# Altium PCB master_rev1.PcbDoc
Units mil, origin at the board's own origin, x right, y up, seen from the top; angles counter-clockwise.
Board outline 6000 x 4000 mil, 4 copper layers (Top Layer, GND, PWR, Bottom Layer), stack 23.756 mil thick; 77 components, 68 nets, 324 pads, 89 vias.
Unrouted connection lines stored in the file: 41.
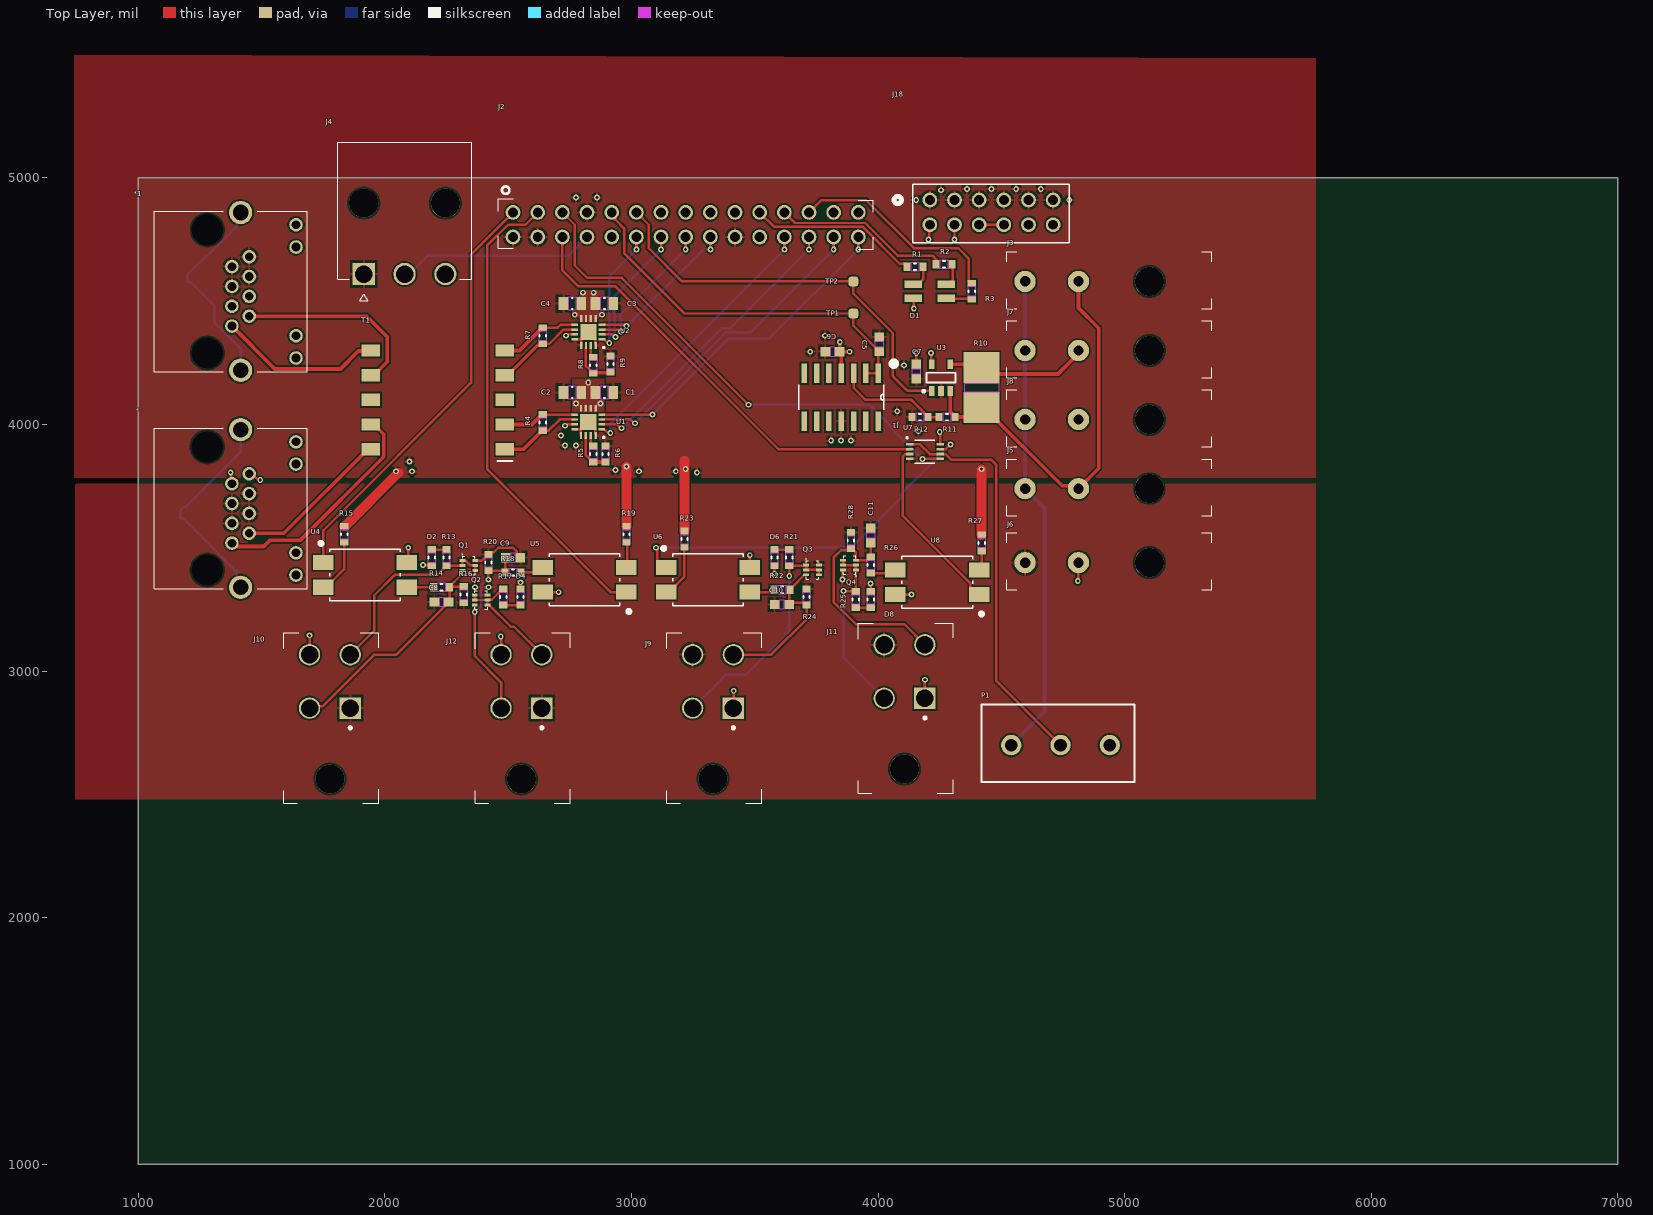
[diagram p0: Top Layer view]
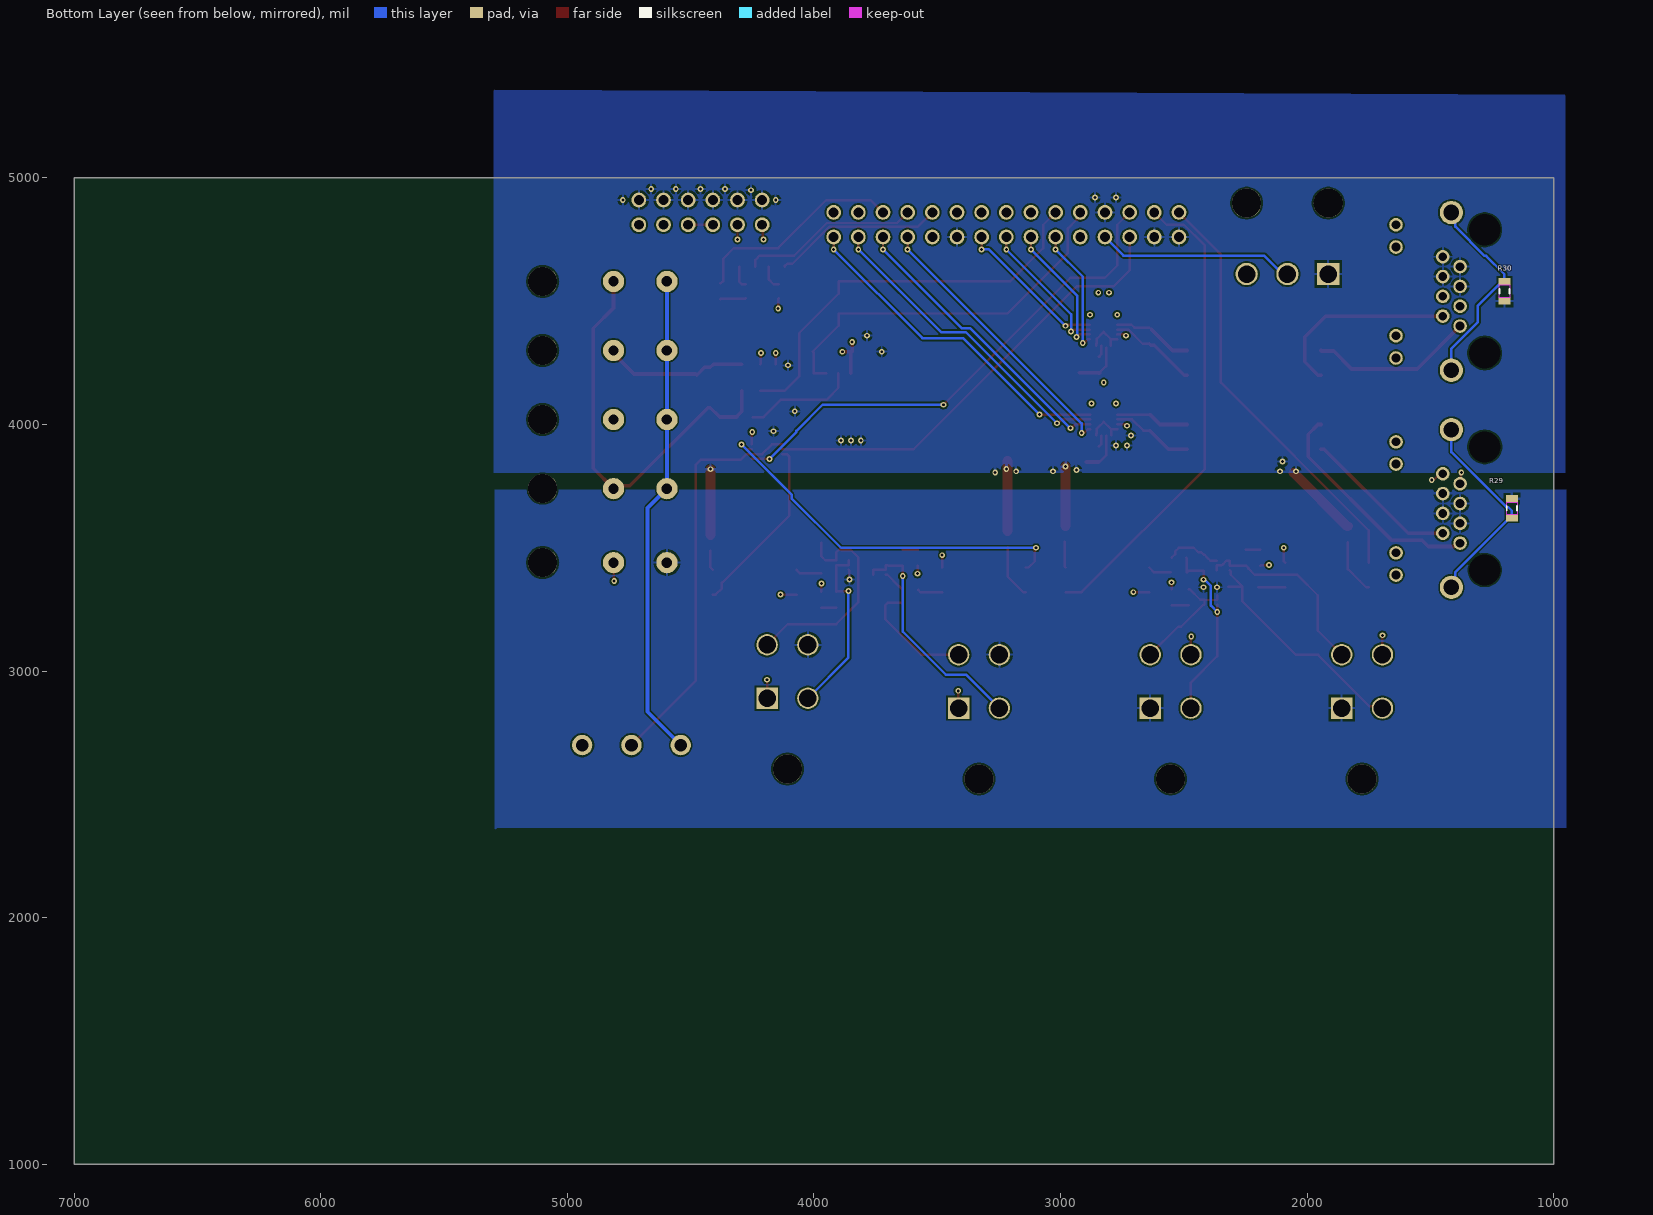
[diagram p1: Bottom Layer view, seen from below]
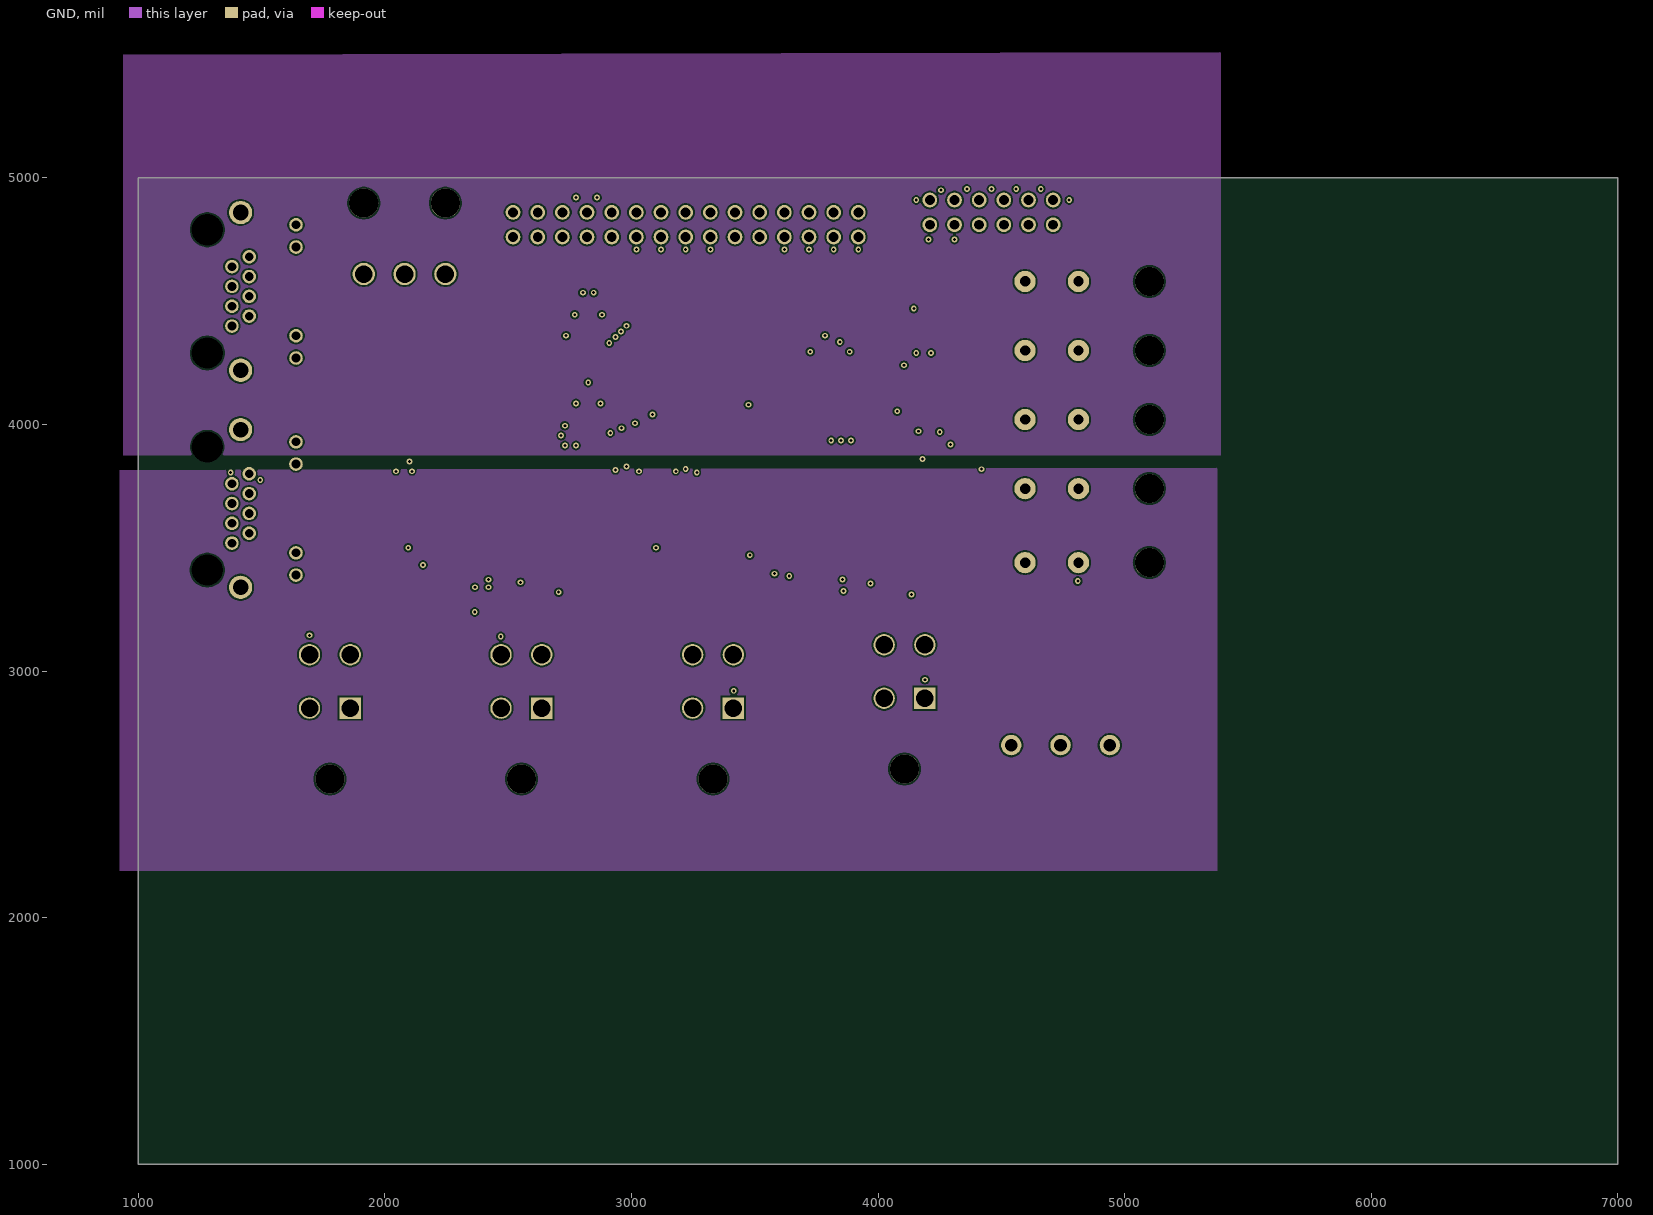
[diagram p2: GND]
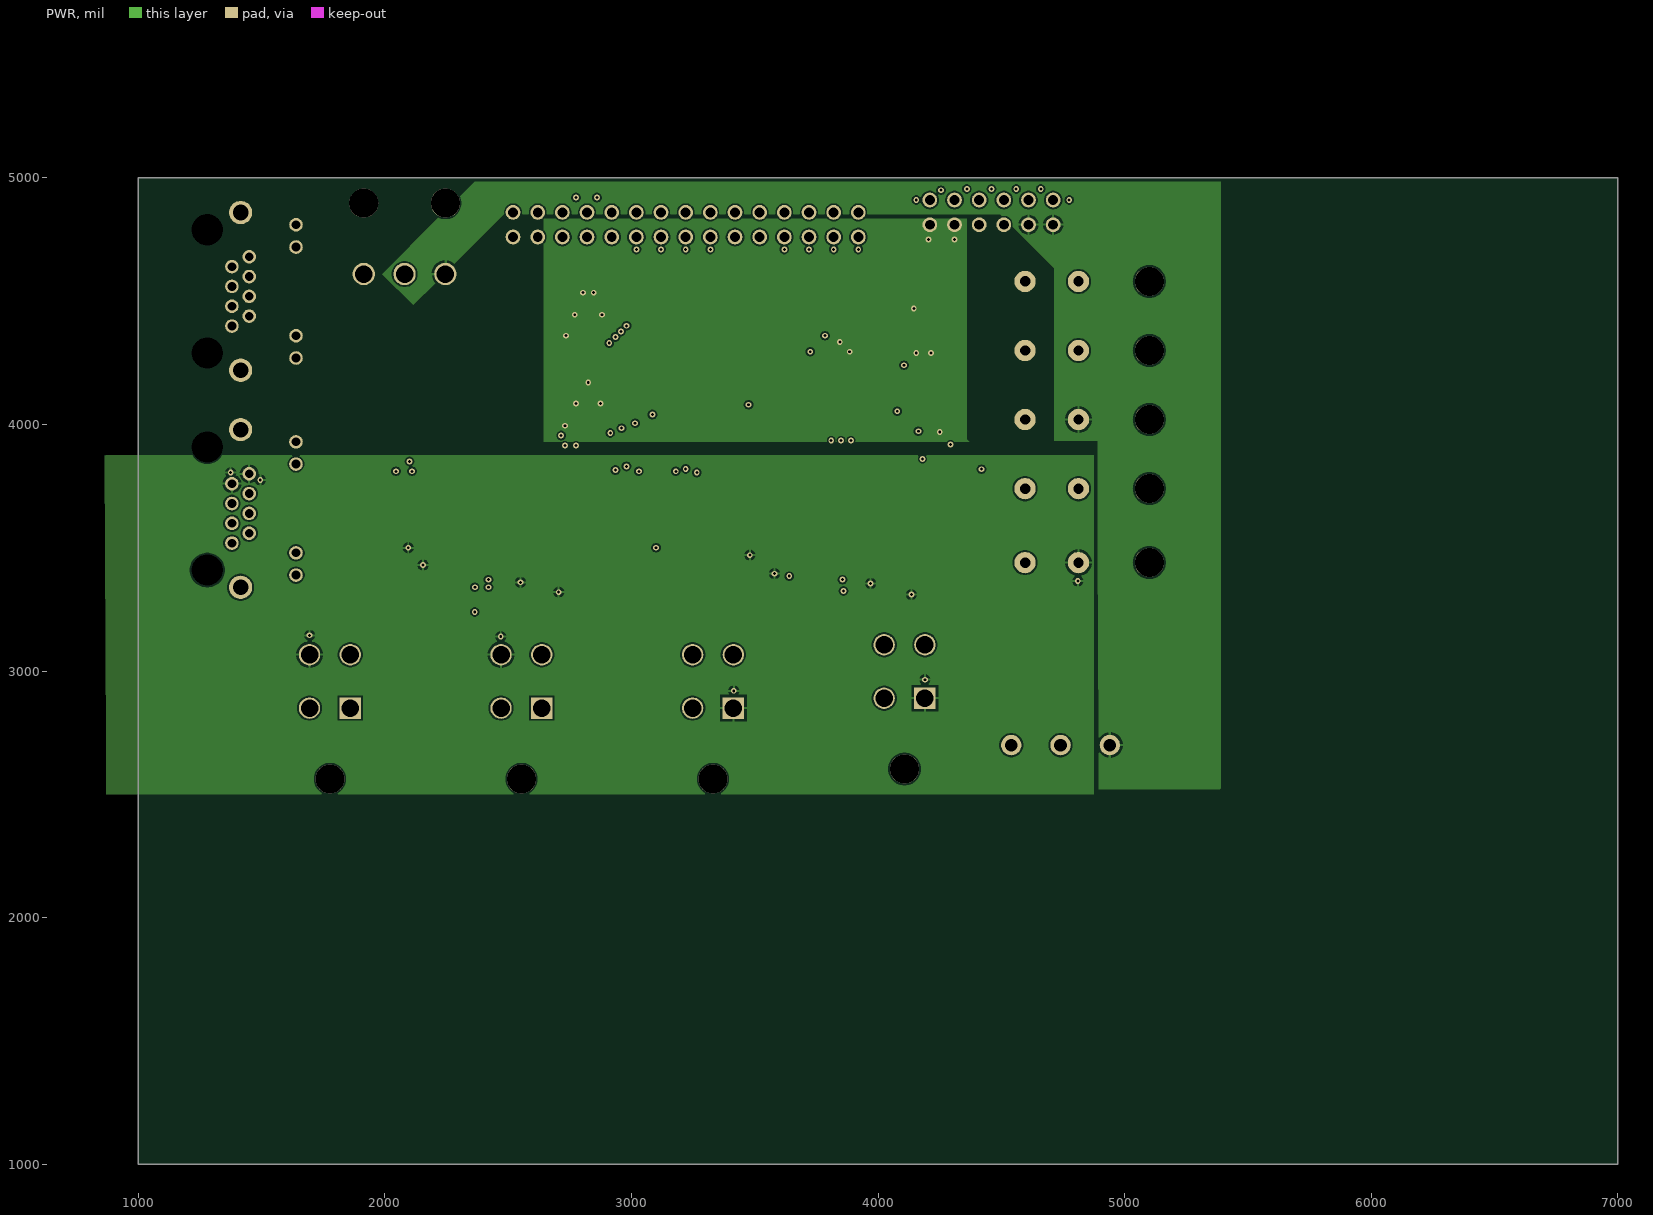
[diagram p3: PWR]
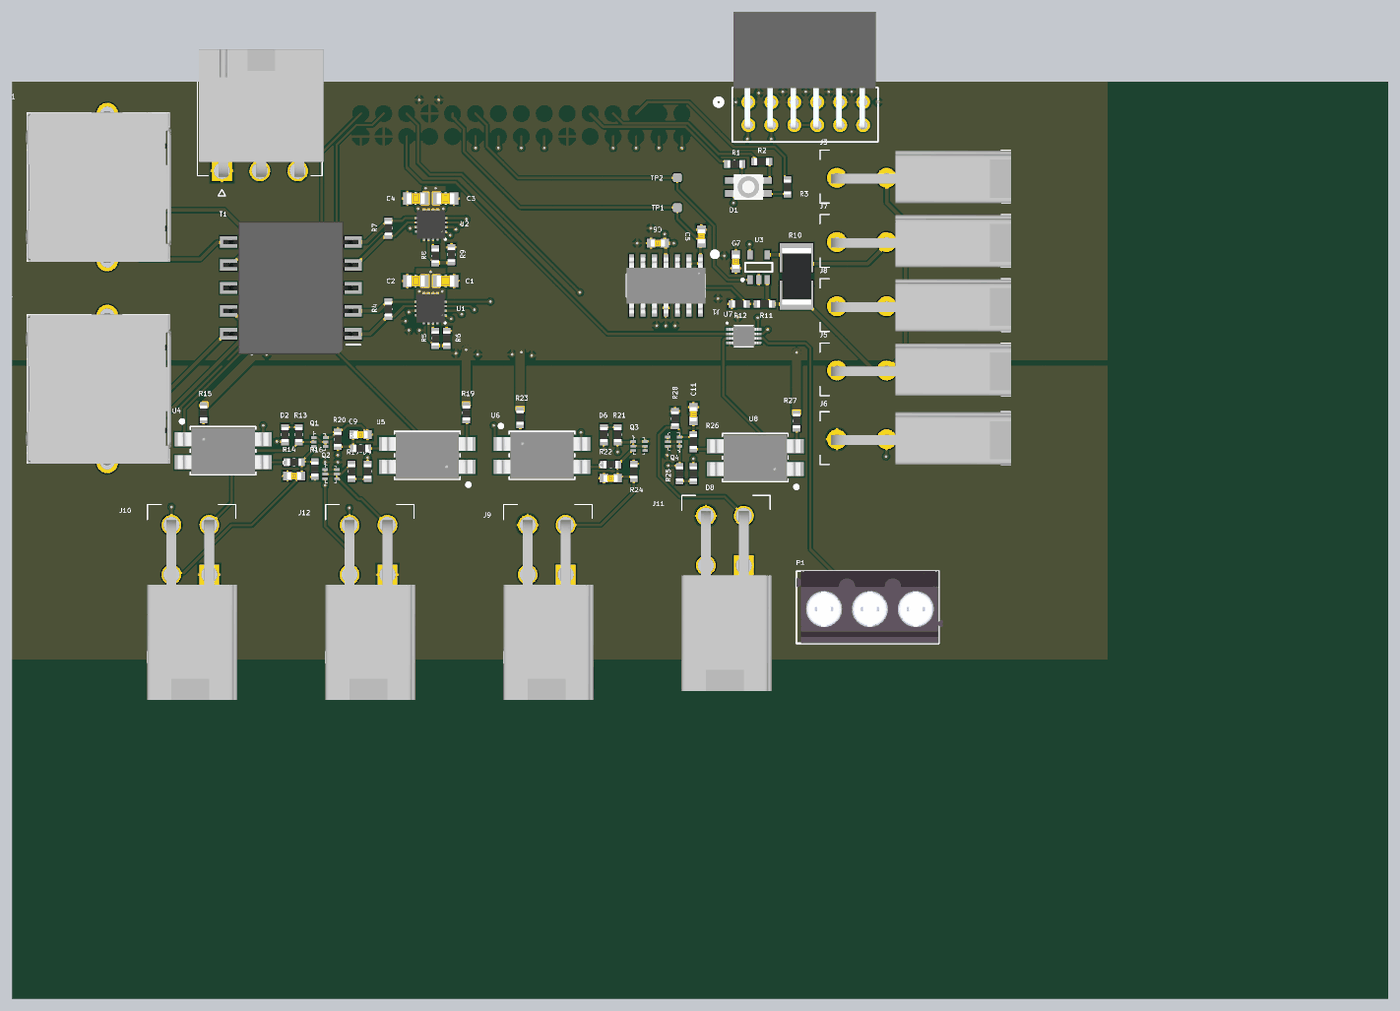
[diagram p4: 3D render of the assembled board from above, using the file's embedded part models]

## Layer stack, top to bottom
Top Solder: solder mask 0.4, Solder Resist, Dk 3.5
Top Layer: signal copper 1.4
Dielectric 2: prepreg 2.8, PP-006, Dk 4.1
GND: signal copper 1.378
Dielectric 1: dielectric 12.6, FR-4, Dk 4.8
PWR: signal copper 1.378
Dielectric 5: prepreg 2.8, PP-006, Dk 4.1
Bottom Layer: signal copper 1.4
Bottom Solder: solder mask 0.4, Solder Resist, Dk 3.5

## Board outline
1000,1000 7000,1000 7000,5000 1000,5000

## Design rules (kind name [scope] priority, off if disabled: settings)
Clearance [All] p1: gap=7 ignorepadtopadclearanceinfootprint=FALSE except(5: Arc-Arc Arc-Track Track-Track)
DiffPairsRouting [All] p1: maxlimit=10 minlimit=10 mostfreqgap=10 toplayer_minwidth=15 toplayer_maxwidth=15 toplayer_prefwidth=15 midlayer1_minwidth=15 midlayer1_maxwidth=15 midlayer1_prefwidth=15 midlayer2_minwidth=15 midlayer2_maxwidth=15 midlayer2_prefwidth=15 bottomlayer_minwidth=15 bottomlayer_maxwidth=15 bottomlayer_prefwidth=15 maxuncoupledlength=500
HoleSize [All] p1: absolutevalues=TRUE maxlimit=1000 minlimit=1 maxpercent=80.000 minpercent=20.000
PolygonConnect PolygonConnect_2 [InNet('3.3V')] p1: connectstyle=Direct reliefconductorwidth=10 reliefentries=4 polygonreliefangle="90 Angle" airgapwidth=10
PolygonConnect [All] p2: connectstyle=Relief reliefconductorwidth=10 reliefentries=4 polygonreliefangle="90 Angle" airgapwidth=10
RoomDefinition U_Precharge [InComponentClass('U_Precharge')] p1: confinementstyle=ConfineIn formatcopy=TRUE lockcomponents=FALSE outline 0,0 2000,0 2000,1000 0,1000
RoomDefinition U_MCU_Platform [InComponentClass('U_MCU_Platform')] p2: confinementstyle=ConfineIn formatcopy=TRUE lockcomponents=FALSE outline 0,0 2000,0 2000,1000 0,1000
RoomDefinition U_LV_Sensing [InComponentClass('U_LV_Sensing')] p3: confinementstyle=ConfineIn formatcopy=TRUE lockcomponents=FALSE outline 0,0 2000,0 2000,1000 0,1000
RoomDefinition U_ISO_SPI [InComponentClass('U_ISO_SPI')] p4: confinementstyle=ConfineIn formatcopy=TRUE lockcomponents=FALSE outline 0,0 2000,0 2000,1000 0,1000
RoomDefinition U_Contactor [InComponentClass('U_Contactor')] p5: confinementstyle=ConfineIn formatcopy=TRUE lockcomponents=FALSE outline 0,0 2000,0 2000,1000 0,1000
RoomDefinition Connectors [InComponentClass('Connectors')] p6: confinementstyle=ConfineIn formatcopy=TRUE lockcomponents=FALSE outline 0,0 2000,0 2000,1000 0,1000
RoutingVias [All] p1: holewidth=28 width=50 viastyle="Through Hole" minholewidth=28 minwidth=50 maxholewidth=28 maxwidth=50
SolderMaskExpansion [All] p1: expansion=4 istentingtop=FALSE
Width [All] p1: maxlimit=40 minlimit=10 preferedwidth=10
28 further rules are at their usual default settings.

## Classes and differential pairs
component class U_Precharge: C8 C9 D2 D4 Q1 Q2 R13 R14 R15 R16 R17 R18 R19 R20 U4 U5
component class U_MCU_Platform: D1 J2 J4 J18 R1 R2 R3
component class U_LV_Sensing: C5 C6 C7 J1 R10 R11 R12 TP1 TP2 U3
component class U_ISO_SPI: C1 C2 C3 C4 R4 R5 R6 R7 R8 R9 T1 U1 U2
component class U_Contactor: C10 C11 D6 D8 Q3 Q4 R21 R22 R23 R24 R25 R26 R27 R28 U6 U7 U8
component class Connectors: * *1 J3 J5 J6 J7 J8 J9 J10 J11 J12 P1 R29 R30
differential pair RX2: +RX2_P -RX2_N
differential pair RX1: +RX1_P -RX1_N
differential pair LV: +LV_P -LV_N
differential pair IPB: +IPB_P -IPB_N
differential pair IPA: +IPA_P -IPA_N

## Components (designator, comment, footprint, x,y, rotation, side; value= is the part's Value field where it differs from the comment)
* "MTJ-88ARX1-FSM-LV" MTJ-88ARX1-FSM-LV 1369.92,3648.9 r270 top
*1 "MTJ-88ARX1-FSM-LV" MTJ-88ARX1-FSM-LV 1370,4529.06 r270 top
C1 "10V" "0805 - Capacitor" 2890,4130 r180 top value=100nF
C2 "10V" "0805 - Capacitor" 2760,4130 r180 top value=100nF
C3 "10V" "0805 - Capacitor" 2890,4490 r180 top value=100nF
C4 "10V" "0805 - Capacitor" 2760,4490 r180 top value=100nF
C5 "Capacitor - Nonpolarized" "0603 - Capacitor" 4005,4325 r270 top value=10nF
C6 "Capacitor - Nonpolarized" "0603 - Capacitor" 3815,4295 r0 top value=100nF
C7 "Capacitor - Nonpolarized" "0603 - Capacitor" 4155,4215 r90 top value=10uF
C8 "Capacitor - Nonpolarized" "0603 - Capacitor" 2230,3280 r0 top value=10pF
C9 "Capacitor - Nonpolarized" "0603 - Capacitor" 2520,3460 r180 top value=10pF
C10 "Capacitor - Nonpolarized" "0603 - Capacitor" 3610,3270 r0 top value=10pF
C11 "Capacitor - Nonpolarized" "0603 - Capacitor" 3970,3550 r270 top value=10pF
D1 "AAA3528LSEEZGKQBKS" "4-PLCC RGB LED" 4210,4540 r180 top
D2 "150060AS75000" "0603 - Resistor" 2190,3460 r90 top
D4 "150060AS75000" "0603 - Resistor" 2550,3300 r270 top
D6 "150060AS75000" "0603 - Resistor" 3580,3460 r90 top
D8 "150060AS75000" "0603 - Resistor" 3970,3290 r270 top
J1 "LM324DR" LM324DR 3845,4105 r270 top
J2 "G431 GPIO" "G431 Header (GPIO Connector)" 3975,5245 r180 top
J3 "MOLEX0039301021" MOLEX0039301021 4812.6,4580 r90 top
J4 "WM23935-ND" MOLEX_39303037 1914.65,4610 r180 top
J5 "MOLEX0039301021" MOLEX0039301021 4812.6,3740 r90 top
J6 "MOLEX0039301021" MOLEX0039301021 4812.6,3440 r90 top
J7 "MOLEX0039301021" MOLEX0039301021 4812.6,4300 r90 top
J8 "MOLEX0039301021" MOLEX0039301021 4812.6,4020 r90 top
J9 "MOLEX0039301042" MOLEX0039301042 3413.33,2850 r0 top
J10 "MOLEX0039301042" MOLEX0039301042 1860,2850 r0 top
J11 "MOLEX0039301042" MOLEX0039301042 4190,2890 r0 top
J12 "MOLEX0039301042" MOLEX0039301042 2636.67,2850 r0 top
J18 "G431 POWER" "G431 HEADER (POWER CONNECTOR)" 4710,4810 r180 top
P1 "1760520000" 1760520000 4540,2700 r0 top
Q1 "Si1078X MOSFET-N" "Si1078X NMOS 30V" 2340,3420 r180 top
Q2 "Si1078X MOSFET-N" "Si1078X NMOS 30V" 2390,3280 r180 top
Q3 "Si1078X MOSFET-N" "Si1078X NMOS 30V" 3733.62,3402.05 r180 top
Q4 "Si1078X MOSFET-N" "Si1078X NMOS 30V" 3884.41,3437.95 r0 top
R1 "1%" "0603 - Resistor" 4150,4640 r0 top value=325R
R2 "1%" "0603 - Resistor" 4267.52,4650 r0 top value=325R
R3 "1%" "0603 - Resistor" 4380,4540 r270 top value=750R
R4 "1%" "0603 - Resistor" 2640,4007.52 r270 top value=120R
R5 "1%" "0603 - Resistor" 2845,3880 r270 top value=3k
R6 "1%" "0603 - Resistor" 2895,3880 r270 top value=1k
R7 "1%" "0603 - Resistor" 2640,4360 r90 top value=120R
R8 "1%" "0603 - Resistor" 2845,4240 r270 top value=3k
R9 "1%" "0603 - Resistor" 2915,4245 r270 top value=1k
R10 "Resistor" "2512 - RESISTOR" 4420,4150 r90 top value=220m
R11 "Resistor" "0603 - Resistor" 4280,4030 r180 top value=220k
R12 "Resistor" "0603 - Resistor" 4170,4030 r0 top value=33k
R13 "Resistor" "0603 - Resistor" 2250,3460 r90 top value=1k
R14 "Resistor" "0603 - Resistor" 2230,3340 r0 top value=320
R15 "Resistor" "0603 - Resistor" 1835,3555 r270 top value=220
R16 "Resistor" "0603 - Resistor" 2320,3310 r90 top value=1k
R17 "Resistor" "0603 - Resistor" 2480,3300 r270 top value=1k
R18 "Resistor" "0603 - Resistor" 2520,3400 r180 top value=320
R19 "Resistor" "0603 - Resistor" 2980,3555 r270 top value=220
R20 "Resistor" "0603 - Resistor" 2420,3440 r270 top value=1k
R21 "Resistor" "0603 - Resistor" 3640,3460 r90 top value=1k
R22 "Resistor" "0603 - Resistor" 3610,3330 r0 top value=320
R23 "Resistor" "0603 - Resistor" 3215,3535 r270 top value=220
R24 "Resistor" "0603 - Resistor" 3710,3300 r270 top value=1k
R25 "Resistor" "0603 - Resistor" 3910,3290 r270 top value=1k
R26 "Resistor" "0603 - Resistor" 3970,3430 r90 top value=320
R27 "Resistor" "0603 - Resistor" 4420,3520 r270 top value=220
R28 "Resistor" "0603 - Resistor" 3890,3530 r270 top value=1k
R29 "Resistor" "0805 - Resistor" 1170,3660 r270 bottom value=DNP
R30 "Resistor" "0805 - Resistor" 1200,4540 r90 bottom value=DNP
T1 "HM2100NLT" HM2100NLT 2215,4100 r90 top
TP1 "Test Point" "Test Point" 3900,4450 r90 top
TP2 "Test Point" "Test Point" 3900,4580 r90 top locked
U1 "LTC6820" LT6820_QFN 2824.88,4010.47 r180 top
U2 "LTC6820" LT6820_QFN 2825.47,4375.12 r180 top
U3 "INA180" INA180 4255,4190 r90 top
U4 "PC817XNNIP0F" PC817XNNIP0F_SHP 1920,3390 r0 top
U5 "PC817XNNIP0F" PC817XNNIP0F_SHP 2810,3370 r180 top
U6 "PC817XNNIP0F" PC817XNNIP0F_SHP 3310,3370 r0 top
U7 "74LVC2G32DC,125" VSSOP8_SOT765-1_NEX 4190,3890 r0 top
U8 "PC817XNNIP0F" PC817XNNIP0F_SHP 4240,3360 r180 top

## Footprints (in the part's own frame and the unit in brackets; to place one, negate y for a bottom-side part, rotate by r counter-clockwise, add the part's x,y. Pads: shape width x height; smd on the part's side, far side on the other; paste and mask are expansions set on the pad)
"4-PLCC RGB LED" [mm]
  rect 1.8x0.75 smd: 1(1.7,-0.725) 2(-1.7,-0.725) 3(-1.7,0.725) 4(1.7,0.725)
  body extent -1.75,-1.4 1.75,1.4, height 1.9
"0603 - Capacitor" [mm] "0603 Chip Capacitor - IPC Medium Density"
  rect 0.95x0.95 smd: 1(-0.75,0) 2(0.75,0)
  Top Layer keep-out region: -0.25,0.45 -0.25,-0.45 0.25,-0.45 0.25,0.45
  body extent -0.8,-0.4 0.8,0.4, height 0.8
"0603 - Resistor" [mm] "0603 Chip Resistor - IPC Medium Density"
  rect 0.7x0.85 smd: 1(-0.825,0) 2(0.825,0)
  Top Layer keep-out region: -0.45,0.4 -0.45,-0.4 0.45,-0.4 0.45,0.4
  silkscreen extent -0.1,-0.33 0.1,0.33, body extent -0.8,-0.4 0.8,0.4, height 0.45
"0805 - Capacitor" [mm] "0805 Chip Capacitor - IPC Medium Density"
  rect 1x1.35 smd: 1(-0.925,0) 2(0.925,0)
  Top Layer keep-out region: -0.4,0.65 -0.4,-0.65 0.4,-0.65 0.4,0.65
  silkscreen extent -0.05,-0.58 0.05,0.58, body extent -1,-0.6 1,0.6, height 1.2
"0805 - Resistor" [mm] "0805 Chip Resistor - IPC Medium Density"
  rect 0.75x1.25 smd: 1(-1,0) 2(1,0)
  Top Layer keep-out region: -0.6,0.6 -0.6,-0.6 0.6,-0.6 0.6,0.6
  silkscreen extent -0.25,-0.53 0.25,0.53, body extent -1,-0.6 1,0.6, height 0.5
"2512 - RESISTOR" [mm]
  rect 3.2x3.7 smd: 1(-2.075,0) 2(2.075,0)
  Top Layer keep-out region: -0.45,1.8 -0.45,-1.8 0.4,-1.8 0.4,1.8
  body extent -3.15,-1.6 3.15,1.6, height 0.6
1760520000 [mm] "5.08mm pitch screw connector"
  round 2.1 hole 1.3: 1(0,0) 2(5.08,0) 3(10.16,0)
  silkscreen extent -3.05,-3.81 12.7,4.19, body extent -3.05,-3.81 13.14,4.19, height 10
"G431 Header (GPIO Connector)" [mil] "30 Position Header Connector 0.100\" (2.54mm) Through Hole, Right Angle Gold"
  round 60 hole 40.16: 1(1455,385) 2(1355,385) 3(1255,385) 4(1155,385) 5(1055,385) 6(955,385) 7(855,385) 8(755,385) 9(655,385) 10(555,385) 11(455,385) 12(355,385) 13(255,385) 14(155,385) 15(55,385) 16(1455,485) 17(1355,485) 18(1255,485) 19(1155,485) 20(1055,485) 21(955,485) 22(855,485) 23(755,485) 24(655,485) 25(555,485) 26(455,485) 27(355,485) 28(255,485) 29(155,485) 30(55,485)
  silkscreen extent -5,280 1515,535, body extent -5,-10 1515,499, height 208
"G431 HEADER (POWER CONNECTOR)" [mil] "12 Position Header Connector 0.100\" (2.54mm) Through Hole, Right Angle Gold"
  round 60 hole 40 mask+0: 1(500,-100) 2(400,-100) 3(300,-100) 4(200,-100) 5(100,-100) 6(0,-100) 7(500,0) 8(400,0) 9(300,0) 10(200,0) 11(100,0) 12(0,0)
  silkscreen extent -65,-164 645,74, body extent -55,-495 565,15, height 200
HM2100NLT [mm]
  rect 1.27x1.89 smd: 1(-5.08,-6.895) 2(-2.54,-6.895) 3(0,-6.895) 4(2.54,-6.895) 5(5.08,-6.895) 6(5.08,6.895) 7(2.54,6.895) 8(0,6.895) 9(-2.54,6.895) 10(-5.08,6.895)
  silkscreen extent -6.29,-7.69 -6.29,-6.14, body extent -7.35,-7.48 7.35,7.48, height 3.2
INA180 [mm] "SOT23, 5-Leads, Body 2.80x2.80mm, Pitch 0.95mm, IPC Medium Density"
  rect 1x0.6 smd: 1(-1.375,0.95) 2(-1.375,0) 3(-1.375,-0.95) 4(1.375,-0.95) 5(1.375,0.95)
  silkscreen extent -1.52,-1.5 0.5,1.9, body extent -0.88,-1.5 0.87,1.5, height 1.1
LM324DR [mil] "General Purpose Amplifier 4 Circuit 14-SOIC"
  rect 78x22 smd: 1(-102.35,155.67) 2(-102.35,105.67) 3(-102.35,55.67) 4(-102.35,5.67) 5(-102.35,-44.33) 6(-102.35,-94.33) 7(-102.35,-144.33) 8(91.65,-144.33) 9(91.65,-94.33) 10(91.65,-44.33) 11(91.65,5.67) 12(91.65,55.67) 13(91.65,105.67) 14(91.65,155.67)
  silkscreen extent -152,-166 46,229, body extent -127,-166 117,178, height 69
LT6820_QFN [mm] "QFN for 6820"
  rect 0.25x0.7 smd mask+0.07: 1(-0.75,1.4) 6(-0.75,-1.4) 7(-0.25,-1.4) 8(0.25,-1.4) 9(0.75,-1.4) 14(0.75,1.4) 15(0.25,1.4) 16(-0.25,1.4)
  rect 0.7x0.25 smd mask+0.07: 2(-1.4,0.75) 3(-1.4,0.25) 4(-1.4,-0.25) 5(-1.4,-0.75) 10(1.4,-0.75) 11(1.4,-0.25) 12(1.4,0.25) 13(1.4,0.75)
  rect 1.65x1.65 smd mask+0.07: 14(0,0)
  silkscreen extent -1.65,1.55 -1.55,1.65, body extent -1.55,-1.55 1.55,1.55, height 0.8
MOLEX0039301021 [mm] "2 connector header through hole right angle molex"
  round 2.2 hole 1.07: 1(0,5.5) 2(0,0)
  round 3 hole 3: M1(0,-7.3)
  silkscreen extent -2.79,-13.72 3.05,7.37, body extent -2.79,-13.78 3.01,6.16, height 11.4
MOLEX0039301042 [mm] "CONN HEADER R/A 4POS 4.2MM"
  rect 2.2x2.2 hole 1.8: 1(0,0)
  round 2.2 hole 1.8: 2(-4.2,0) 3(0,5.5) 4(-4.2,5.5)
  round 3 hole 3: M1(-2.1,-7.3)
  silkscreen extent -6.86,-9.78 2.92,7.75, body extent -6.9,-13.9 3.1,6.04, height 11.01
MOLEX_39303037 [mm] "Connector Header Through Hole, Right Angle 3 position 0.165\" (4.20mm)"
  rect 2.3x2.3 / inner round 2.3 / far side rect 2.3x2.3 hole 1.8 mask+0.076: 1(0,0)
  round 2.3 hole 1.8 mask+0.076: 2(-4.2,0) 3(-8.4,0)
  round 3 hole 3 unplated mask+0.076: ""(-8.4,-7.3) ""(0,-7.3)
  silkscreen extent -11.1,-13.55 2.7,2.76, body extent -11.26,-13.45 2.54,0.64, height 7.2
MTJ-88ARX1-FSM-LV [mm] "RJ45 Connector"
  round 1.4 hole 0.9: 1(3.302,0.254) 2(2.282,2.034) 3(1.262,0.254) 4(0.242,2.034) 5(-0.778,0.254) 6(-1.798,2.034) 7(-2.818,0.254) 8(-3.838,2.034) 9(6.592,6.854) 10(4.302,6.854) 11(-4.838,6.854) 12(-7.128,6.854)
  round 2.4 hole 1.6: MH1(7.857,1.144) MH2(-8.393,1.144)
  round 1.6 hole 3.2 unplated: MH3(6.082,-2.286) MH4(-6.618,-2.286)
  silkscreen extent -8.52,-7.75 7.98,8, body extent -8.65,-7.91 8.15,8.26, height 12.95
PC817XNNIP0F_SHP [mil]
  rect 83x61 smd paste+0 mask+0: 1(-169.5,50) 2(-169.5,-50) 3(169.5,-50) 4(169.5,50)
  silkscreen extent -184,-105 143,132, body extent -197,-100 197,100, height 157
"Si1078X NMOS 30V" [mm] "MOSFET 30V Vds 12V Vgs SC89-6"
  rect 0.6x0.3 smd mask+0.05: 1(0.65,-0.71) 2(0.65,-0.21) 3(0.65,0.29) 4(-0.67,-0.71) 5(-0.67,-0.21) 6(-0.67,0.29)
  silkscreen extent -0.63,-1.37 0.69,0.75
"Test Point" [mm] "Test Point"
  rrect50% 1x1 smd: 1(0,0)
VSSOP8_SOT765-1_NEX [mil] "IC GATE OR 2CH 2-INP 8TSSOP"
  rect 30x11 smd paste+0 mask+0: 1(-62,29.53) 2(-62,9.84) 3(-62,-9.84) 4(-62,-29.53) 5(62,-29.53) 6(62,-9.84) 7(62,9.84) 8(62,29.53)
  silkscreen extent -74,-46 41,58, body extent -63,-41 63,41, height 39

## Part data
* *1: "RJ45 Connector"
C1 C2 C3 C4: library part "Capacitor - Nonpolarized", "C0805C103K8RAC7800. 10000pF ±10% 10V Ceramic Capacitor X7R 0805 (2012 Metric)", Manufacturer=YAGEO, Manufacturer Part Number=CC0805MRX7R9BB103, Rating=50V, Supplier Part Number=311-4350-1-ND, Supplier=Digi-Key
C5 C6 C7 C8 C9 C10 C11: "Nonpolarized Capacitor"
D1: library part "RGB LED- Common Anode", "Red, Green, Blue (RGB) 621nm Red, 525nm Green, 465nm Blue LED Indication - Discrete 1.8V Red, 2.7V Green, 2.7V Blue 4-PLCC", Manufacturer=Kingbright, Supplier Part Number=754-1967-1-ND, Manufacturer Part Number=AAA3528LSEEZGKQBKS, Supplier=Digi-Key
D2 D4 D6 D8: library part LED, "Amber 605nm LED Indication - Discrete 2V 0603 (1608 Metric)", Manufacturer="Würth Elektronik", Supplier Part Number=732-150060AS75000CT-ND, Manufacturer Part Number=150060AS75000, Supplier=Digi-Key
J1: "General Purpose Amplifier 4 Circuit 14-SOIC", Manufacturer Name=TI, Supplier Part Number=296-14597-2-ND, Manufacturer Part Number=LM324DR, Supplier=Digikey
J2: "PPPC152LJBN-RC (30 Position Header Connector 0.100\" (2.54mm) Through Hole, Right Angle Gold)", Manufacturer Name="Sullins Connector Solutions", Manufacturer Part Number (CONN)=PPPC152LJBN-RC, Supplier Part Number=S5568-ND, Supplier Name=Digikey
J3 J5 J6 J7 J8: "Connector Header Through Hole, Right Angle 2 pin 0.165\" (4.20mm)"
J4: "Conn Power HDR 3 POS 4.2mm Solder RA Thru-Hole 3 Terminal 1 Port Mini-Fit Jr Bag", Package=None, Check_prices=https://www.snapeda.com/parts/39303037/Molex/view-part/?ref=eda, ComponentLink1Description="Manufacturer name", ComponentLink1URL=Molex, ComponentLink2Description="Manufacturer part number", ComponentLink2URL=0039303037, ComponentLink3Description="Supplier name", ComponentLink3URL=Digikey, ComponentLink4Description="Supplier part number", ComponentLink4URL=WM23935-ND, MF=Molex, MP=39303037, Purchase-URL=https://pricing.snapeda.com/search/part/39303037/?ref=eda, SnapEDA_Link=https://www.snapeda.com/parts/39303037/Molex/view-part/?ref=snap
J9 J10 J11 J12: "Connector Header Through Hole, Right Angle 4 position 0.165\" (4.20mm)", Manufacturer=Molex, Manufacturer Part Number=0039301042, Supplier Part Number=WM21364-ND, ComponentLink1Description=Datasheet, ComponentLink1URL=https://www.molex.com/pdm_docs/sd/039301042_sd.pdf, Supplier=Digikey
J18: "PPPC062LJBN-RC (12 Position Header Connector 0.100\" (2.54mm) Through Hole, Right Angle Gold)", Manufacturer Name="Sullins Connector Solutions", Manufacturer Part Number=PPPC062LJBN-RC, Supplier Part Number=S5559-ND, Supplier Name=Digikey
P1: "1x3 Screw Terminal Block", Manufacturer=Weidmüller, Supplier Part Number=281-1883-ND, ComponentLink1Description=Datasheet, ComponentLink1URL=https://media.digikey.com/pdf/Data%20Sheets/Weidmuller%20PDFs/1760520000.pdf, Manufacturer Part Number=1760520000, Supplier=Digikey
Q1 Q2 Q3 Q4: "N-Channel 30 V (D-S) MOSFET", Manufacturer Name="Vishay Semiconductors", Manufacturer Part Number=SI1078X-T1-GE3, Supplier Part Number=78-SI1078X-T1-GE3, ComponentLink1Description=Mouser, ComponentLink1URL=https://www.mouser.ca/ProductDetail/Vishay-Semiconductors/SI1078X-T1-GE3?qs=EBLjwc9jJJulNr1%252B%2FwN60A%3D%3D, Supplier Name=Mouser
R1 R2 R3: library part Resistor, "RC0603FR-07232RL, RES 232 OHM 1% 1/10W 0603", Manufacturer=YAGEO, Manufacturer Part Number=RC0603FR-07232RL, Rating=0.1W, Supplier Part Number=311-232HRCT-ND, Supplier=Digi-Key
R4 R7: library part Resistor, "RC0603FR-07120RL. 120 Ohms ±1% 0.1W, 1/10W Chip Resistor 0603 (1608 Metric) Moisture Resistant Thick Film", Manufacturer=YAGEO, Manufacturer Part Number=RC0603FR-10120RL, Rating=0.1W, Supplier Part Number=13-RC0603FR-10120RLCT-ND, Supplier=Digi-Key
R5 R8: library part Resistor, "RMCF0603FT3K00. 3 kOhms ±1% 0.1W, 1/10W Chip Resistor 0603 (1608 Metric) Automotive AEC-Q200 Thick Film", Manufacturer=YAGEO, Manufacturer Part Number=RC0603FR-073KL, Rating=0.1W, Supplier Part Number=311-3.00KHRCT-ND, Supplier=Digi-Key
R6 R9: library part Resistor, "RC0603FR-071KL .1 kOhms ±1% 0.1W, 1/10W Chip Resistor 0603 (1608 Metric) Moisture Resistant Thick Film", Manufacturer=YAGEO, Manufacturer Part Number=RC0603JR-071KL, Rating=0.1W, Supplier Part Number=311-1.0KGRCT-ND, Supplier=Digi-Key
T1: "Pulse Transformer 1:1 Surface Mount 150µH, 450µH", Manufacturer="Pulse Electronics", Supplier Part Number=1840-1032-1-ND, Datasheet=https://productfinder.pulseeng.com/doc_type/WEB301/doc_num/HM2100NL/doc_part/HM2100NL.pdf, Manufacturer Part Number=HM2100NLT, Supplier=Digikey
U1 U2: Manufacturer="Analog Devices", Manufacturer Part Number=LTC6820IMS#TRPBF, Supplier Part Number=LTC6820IMS#TRPBFCT-ND, Supplier=Digikey
U3: "0V to 26V Current Sense Amplifier", Manufacturer="Texas Instruments", Manufacturer Part Number=INA180A2IDBVR, Supplier Part Number=296-47653-1-ND, ComponentLink1Description=Datasheet, ComponentLink1URL=https://www.ti.com/lit/ds/symlink/ina180.pdf?ts=1618562671692&ref_url=https%253A%252F%252Fwww.google.com%252F, Supplier=Digikey
U4 U5 U6 U8: "Transistor Output Optocouplers Photocoupler", Manufacturer Name=Sharp, Supplier Part Number=852-PC817X3NIP1B, Manufacturer Part Number=PC817XNNIP0F, Supplier=Mouser, Type=DEV
U7: "IC GATE OR 2CH 2-INP 8TSSOP", Manufacturer Name=Nexperia, Supplier Part Number=1727-5991-2-ND, Manufacturer Part Number=74LVC2G32DC,125, Supplier Name=Digikey

## Via types
v1: diameter 23.62, hole 11.81, Top Layer to Bottom Layer, tented both sides, 89 vias

## Nets (pads, with @x,y where several pads share a name; then routed paths per layer and width w, separated by ;. In a path a pad name is that pad's centre, name@x,y a point inside that pad or via, vN(x,y) a via of type N, cw(c..) or ccw(c..) an arc to the next point about the centre after c; other vN are vias at no path point)
3.3V: C1.2 C2.1 C3.2 C4.1 C6.2 C7.2 D1.4 J1.4 J18.7 J18.8 U1.6 U1.7 U1.8 U1.9 U1.12 U2.6 U2.7 U2.8 U2.9 U2.12 U3.5 U7.8 | length 559.2
  Top Layer w10: v1(2730,3995) 2733.69,3995 2739.32,4000.63 U1.12 ; v1(2735,4360) 2738.69,4360 2743.88,4365.2 2770.28,4365.2 U2.12 ; D1.4 4145,4509.53 v1(4145,4470) ; C7.2 v1(4155,4290) ; v1(4205,4750) 4207.5,4752.5 4207.5,4807.5 J18.7 ; v1(4215,4290) 4216.3,4288.7 4216.3,4245.43 U3.5 ; v1(4250,3970) 4252,3968 U7.8 U7.8@4252.47,3920 ; v1(4310,4750) J18.8
  Top Layer w15: v1(3845,4335) 3845,4295.47 C6.2 ; J1.4 3850.67,4288.86 C6.2 ; v1(3885,4295) C6.2
  other v1: 2775,4085 2875,4085 2825,4170 2770,4445 2880,4445 2803.19,4534.34 2846.81,4534.34
5V: J18.9 J18.10 | length 100
  Top Layer w10: J18.9 J18.10
12V: J4.3 J8.2 J18.11 J18.12 P1.3
22_1V_SENSE: J1.3 R11.2 R12.2 | length 456.2
  Top Layer w10: J1.3 3900.67,4149.1 3949.77,4100 4135.43,4100 4202.48,4032.95 R12.2 R11.2
ADC_ISense: J2.6 TP2.1 U3.1 | length 1685
  Top Layer w10: J2.6 3070,4810 3070,4715 3205,4580 TP2.1 3900,4530 4060,4370 4060,4195 4119.13,4135.87 U3.1
ADC_VSense: C5.2 J1.1 J1.2 J2.5 TP1.1 | length 1555.5
  Top Layer w10: J2.5 2920,4846.47 2934.32,4832.15 2934.32,4830.68 2970,4795 2970,4695 3215,4450 TP1.1 3900,4400.47 4005.47,4295 4000.67,4290.2 J1.1 J1.2
B: J2.11 R1.1 | length 690.4
  Top Layer w10: J2.11 3578,4802 3937.4,4802 4087.66,4651.73 4108.74,4651.73 4117.52,4642.95 R1.1
CONT_1: J2.18 U7.2 | length 1843.4
  Top Layer w10: J2.18 2720,4625 2785,4560 2935,4560 3595.16,3899.84 U7.2
CONT_2: J2.3 U7.5 | length 2046
  Top Layer w10: J2.3 2770,4810 2770,4645 2820,4595 2960,4595 v1(3475,4080) ; v1(4180,3860) 4180.24,3860.24 4251.76,3860.24 U7.5
  Bottom Layer w10: v1(3475,4080) 3965,4080 4071.2,3973.8 4071.2,3968.8 v1(4180,3860)
G: J2.12 R2.1 | length 724.7
  Top Layer w10: J2.12 3663,4817 3948,4817 4080,4685 4220,4685 4237.52,4667.48 R2.1@4237.52,4640
GND: *1.5 *1.6 *1.7 *1.8 C1.1 C2.2 C3.1 C4.2 C5.1 C6.1 C7.1 J1.11 J2.4 J2.16 J2.17 J2.25 J4.1 J18.1 J18.2 J18.3 J18.4 J18.5 J18.6 R6.1 R9.1 R12.1 R15.1 R19.1 R23.1 R27.1 R30.1 U1.1 U1.13 U1.14 U2.1 U2.13 U2.14 U3.2 U7.4 | length 1425.7
  Top Layer w10: v1@2055,3804.53 v1@2055,3805 ; U1.13 2769.84,3981.02 U1.14@2795.43,3981.02 ; U2.13 2770.43,4345.67 U2.14@2796.02,4345.67 ; U1.14@2795.35,3955.35 2795.35,3980.94 U1.14@2795.43,3981.02 ; U2.14@2795.94,4320 2796.02,4320.08 U2.14@2796.02,4345.67 ; U1.1 2854.41,3964.06 2852.36,3966.1 2852.36,3982.99 2824.88,4010.47 U1.14@2795.43,3981.02 ; U2.1 2855,4328.7 2852.95,4330.75 2852.95,4347.64 2825.47,4375.12 U2.14@2796.02,4345.67
  Top Layer w40: R15.1 1837.95,3587.48 v1@2055,3804.53 ; v1(2979.66,3830.13) 2979.66,3587.82 R19.1 ; R23.1 3215,3852.83 ; v1(4419.66,3818.69) 4419.66,3552.82 R27.1
  other v1: 3265,3805 2045,3810 2110,3810 3030,3810 3180,3810 2935,3815 3220,3820 2100,3850 2730,3915 2775,3915 3810,3935 3850,3935 3890,3935 2715,3955 4163.49,3972.65 4077.65,4053.49 4105,4240 3725,4295 3785,4360 4155,4910 4775,4910 2775,4920 2860,4920 4255,4950 4360,4955 4460,4955 4560,4955 4660,4955
HV_CS: J2.24 U2.5 | length 619.7
  Top Layer w10: U2.5 2972.13,4404.65 2976.78,4400 v1(2980.46,4400) ; v1(3320,4710) J2.24
  Bottom Layer w10: v1(2980.46,4400) 3290.46,4710 v1(3320,4710)
HV_MISO: J2.22 U2.3 | length 542.1
  Top Layer w10: U2.3 2922.24,4365.28 2932.52,4355 v1(2935,4355) ; v1(3120,4710) J2.22
  Bottom Layer w10: v1(2935,4355) 2932.84,4357.16 2932.84,4522.84 v1(3120,4710)
HV_MOSI: J2.21 U2.2 | length 502.6
  Top Layer w10: U2.2 2889.29,4345.59 v1@2902.28,4332.61 ; v1(3020,4710) J2.21
  Bottom Layer w10: v1(2910,4330) 2910,4600 v1(3020,4710)
HV_SCK: J2.23 U2.4 | length 571.9
  Top Layer w10: U2.4 2945.85,4384.96 2953.54,4377.26 v1(2957.23,4377.26) ; v1(3220,4710) J2.23
  Bottom Layer w10: v1(2957.23,4377.26) 2956.65,4377.84 2956.65,4446.65 v1(3220,4710)
IMD: P1.2 U7.1 U7.6 | length 1630.4
  Top Layer w10: U7.1 4170.56,3919.53 4209.94,3880.16 U7.6 4273.32,3880.16 4295.75,3857.73 4458.49,3857.73 4480,3836.21 4480,2960 P1.2
IPA_N: *1.2 T1.7 | length 784.5
  Top Layer w15: *1.2 1925.79,4439.21 2010,4355 2010,4254.25 1955.75,4200 T1.7
IPA_P: *1.1 T1.6 | length 666.7
  Top Layer w15: *1.1 1554.06,4225 1820,4225 1892.63,4297.63 1941.17,4297.63 T1.6
IPB_N: *.2 T1.10 | length 634.8
  Top Layer w15: *.2 1590.39,3559.06 1931.34,3900 T1.10
IPB_P: *.1 T1.9 | length 931.4
  Top Layer w15: *.1 1390.78,3518.9 1404.67,3505 1508.86,3505 1533.86,3530 1656.25,3530 1995.25,3868.99 1995.25,3960.5 1955.75,4000 T1.9
ISO-12V: *.7 *.8 D2.1 D4.1 D6.1 D8.1 J6.2 J9.1 J10.4 J11.1 J12.4 U4.4 U5.4 U6.4 U8.4 | length 847
  Top Layer w10: v1(1375,3805) 1377.46,3802.54 1377.46,3762.3 *.7 ; *.8 1462.21,3800 1484.6,3777.61 1492.39,3777.61 v1(1495,3775) ; J10.4 1694.65,3144.65 v1(1695,3145) ; U4.4 2095,3445.5 v1(2095,3500) ; v1(2155,3430) 2156.24,3428.76 2188.76,3428.76 D2.1 ; v1(2470,3140) 2471.31,3138.69 J12.4 ; D4.1 v1(2550,3360) ; U5.4 v1(2705,3320) ; J9.1 3415,2851.67 v1(3415,2920) ; U6.4 3480,3420.5 v1(3480,3470) ; v1(3580,3395) D6.1 ; D8.1 v1(3970,3355) ; U8.4 v1(4135,3310) ; J11.1 v1(4190,2965) ; v1(4810,3365) 4811.3,3366.3 4811.3,3438.7 J6.2
ISO-GND: *.3 *.4 *.5 *.6 C8.1 C9.1 C10.1 C11.1 J6.1 J9.4 J10.1 J11.4 J12.1 Q1.4 Q2.4 Q3.4 Q4.4 R16.1 R20.1 R24.1 R28.1 R29.1 | length 268.1
  Top Layer w10: Q1.4 2393.19,3447.95 2408.27,3463.03 2408.27,3463.7 2417.05,3472.48 R20.1 2428.78,3481.26 2441.26,3481.26 2460,3500 2520,3500 2535.83,3484.17 2535.83,3473.7 C9.1 ; v1(3855.76,3370.76) 3856.89,3371.89 3856.89,3409.09 3857.8,3410 Q4.4
  other v1: 2365,3340 2420,3340
LV-BGND: J3.1 J5.1 J7.1 J8.1 P1.1 | length 1968.6
  Bottom Layer w15: P1.1 4675,2835 4675,3661.06 J5.1 J8.1 J7.1 J3.1
LV_N: J7.2 R10.2 U3.4 | length 586.8
  Top Layer w15: U3.4 4407.56,4244.13 R10.2 4443.31,4231.69 4475,4200 4480,4205 4729.36,4205 4812.6,4288.24 J7.2
LV_P: J3.2 J5.2 R10.1 R11.1 U3.3 | length 1674.4
  Top Layer w15: U3.3 4292.4,4053.03 4312.48,4032.95 R11.1 4381.69,4030 R10.1 4429.84,4068.31 4746.79,3751.36 4801.24,3751.36 J5.2 4895,3822.4 4895,4390 4812.6,4472.4 J3.2
Net*1_MH1: *1.MH1 *1.MH2 R30.2 | length 826.9
  Bottom Layer w10: *1.MH1 1415.04,4308.07 1309.24,4413.87 1309.24,4479.97 1209.84,4579.37 R30.2 1200,4609.13 1274.7,4683.84 1280.29,4683.84 1398.87,4802.42 1398.87,4843.32 *1.MH2
Net*_MH1: *.MH1 *.MH2 R29.2 | length 852.8
  Bottom Layer w10: *.MH1 1398.79,3355.73 1398.79,3401.68 1179.84,3620.63 R29.2 1170,3650.39 1184.62,3665.01 1191.99,3665.01 1414.96,3887.99 *.MH2
NetC8_2: C8.2 J10.2 Q1.3 R14.2 R16.2 | length 952.9
  Top Layer w10: J10.2 1701.74,2857.09 1747.09,2857.09 1955.48,3065.48 2045.01,3065.48 C8.2 2262.48,3282.95 R14.2 ; Q1.3 2310,3404.17 2310,3390.47 2262.48,3342.95 R14.2 ; R16.2 2264.96,3342.48 R14.2
NetC9_2: C9.2 J12.2 Q2.3 R18.2 R20.2 | length 787.2
  Top Layer w10: Q2.3 2364.41,3060.59 2471.31,2953.69 J12.2 ; v1(2420,3370.62) R20.2 2480,3407.52 R18.2 2487.52,3457.05 C9.2
  Bottom Layer w10: v1(2364.57,3239.76) 2390.6,3265.79 2390.6,3344.28 2416.95,3370.62 v1(2420,3370.62)
NetC10_2: C10.2 J9.3 Q3.3 R22.2 R24.2 | length 641.3
  Top Layer w10: J9.3 3566.54,3066.54 3710,3210 R24.2 3701.22,3276.3 C10.2@3639.53,3276.3 ; C10.2 C10.2@3639.53,3276.3 ; Q3.3 3702.13,3390.63 3653.23,3341.73 3651.26,3341.73 3642.48,3332.95 R22.2 3639.53,3327.05 C10.2@3639.53,3276.3
NetC11_2: C11.2 J11.3 Q4.3 R26.2 R28.2 | length 887.2
  Top Layer w10: C11.2 3970,3465.43 3953.94,3449.37 Q4.3 3910,3480.47 3892.95,3497.52 3886.34,3490.91 3850.91,3490.91 3820,3460 3820,3280 3910,3190 4106.54,3190 J11.3
NetD1_1: D1.1 R1.2 | length 99.9
  Top Layer w10: D1.1 4163.74,4568.54 4182.48,4587.28 R1.2
NetD1_2: D1.2 R2.2 | length 91.3
  Top Layer w10: D1.2 4292.72,4568.54 4302.48,4578.31 R2.2@4302.48,4640
NetD1_3: D1.3 R3.2 | length 104.7
  Top Layer w10: D1.3 4278.9,4509.49 4378.03,4509.49 R3.2
NetD2_2: D2.2 R13.2 | length 60
  Top Layer w10: D2.2 R13.2
NetD4_2: D4.2 R17.2 | length 70
  Top Layer w10: R17.2 D4.2
NetD6_2: D6.2 R21.2 | length 60
  Top Layer w10: D6.2 R21.2
NetD8_2: D8.2 R25.2 | length 60
  Top Layer w10: R25.2 D8.2
NetJ9_2: J9.2 Q3.1 Q3.2 Q3.5 Q3.6 R21.1 | length 949.8
  Top Layer w10: J9.2 J9.2@3248.99,2851.01 ; v1(3640,3385) R21.1 3699.65,3427.52 3702.13,3430 Q3.1 Q3.2 Q3.5 Q3.6
  Bottom Layer w10: J9.2 3383.6,2985.62 3465.62,2985.62 3640,3160 v1(3640,3385)
NetJ10_3: J10.3 Q1.1 Q1.2 Q1.5 Q1.6 R13.1 | length 789.8
  Top Layer w10: J10.3 1957.33,3163.87 1957.33,3307.33 2040,3390 2212.48,3390 2238.27,3415.79 2238.27,3418.74 2247.05,3427.52 R13.1 2250.37,3427.89 2314.04,3427.89 Q1.2 Q1.1 2315.31,3447.05 2328.39,3447.05 2340,3435.43 2340,3435 2346.73,3428.27 Q1.5 Q1.6
NetJ11_2: J11.2 Q4.1 Q4.2 Q4.5 Q4.6 R25.1 | length 733.4
  Top Layer w10: Q4.6 Q4.5 Q4.2 Q4.1 R25.1 3908.74,3323.74 3861.26,3323.74 v1(3860,3325) ; J11.2 J11.2@4024.82,2890.18
  Bottom Layer w10: v1(3860,3325) 3860,3054.65 J11.2
NetJ12_3: J12.3 Q2.1 Q2.2 Q2.5 Q2.6 R17.1 | length 477.3
  Top Layer w10: Q2.1 Q2.2 Q2.5 ; R17.1 2477.05,3332.48 2433.74,3289.17 2417.28,3289.17 Q2.5 ; J12.3 2523.58,3179.62 2511.25,3179.62 2422.28,3268.58 Q2.6 Q2.5
NetR5_1: R5.1 U1.16 | length 48
  Top Layer w10: U1.16 2834.72,3921.26 2843.5,3912.48 R5.1
NetR5_2: R5.2 R6.2 U1.15 | length 172
  Top Layer w10: U1.15 2815.04,3874.53 2842.05,3847.52 R5.2
  Top Layer w15: R5.2 R6.2
NetR8_1: R8.1 U2.16 | length 52.4
  Top Layer w10: U2.16 2835.31,4283.78 R8.1@2844.09,4275 ; R8.1@2841.2,4275 R8.1@2844.09,4275 ; R8.1@2845,4275 R8.1@2844.09,4275
NetR8_2: R8.2 R9.2 U2.15 | length 193.5
  Top Layer w10: U2.15@2815.55,4311.22 2815.55,4308.18 2815.37,4308 2815.37,4236.72 R8.2@2842.05,4210.04
  Top Layer w15: R8.2@2842.05,4207.52 R8.2 ; R8.2@2845,4210.04 R9.2@2923.28,4210.04
NetR14_1: R14.1 U4.3 | length 108
  Top Layer w10: U4.3 R14.1
NetR15_2: R15.2 U4.2 | length 224
  Top Layer w10: U4.2 1761.5,3340 1787,3365.5 1835,3413.5 R15.2
NetR18_1: R18.1 U5.3 | length 96.3
  Top Layer w10: R18.1 2620.5,3400 U5.3
NetR19_2: R19.2 U5.2 | length 106.2
  Top Layer w10: U5.2 2982.48,3422.98 R19.2@2982.48,3525
NetR22_1: R22.1 U6.3 | length 102.9
  Top Layer w10: U6.3 3568.74,3320 3577.52,3328.78 R22.1
NetR23_2: R23.2 U6.2 | length 219.8
  Top Layer w10: U6.2 3151.5,3320 3177,3345.5 3215,3383.5 R23.2
NetR26_1: R26.1 U8.3 | length 105.7
  Top Layer w10: R26.1 4058.02,3397.52 U8.3
NetR27_2: R27.2 U8.2 | length 81.9
  Top Layer w10: U8.2 4420,3420.5 R27.2
OR1: U6.1 U7.7 | length 1528.9
  Top Layer w10: v1(3100,3500) 3100,3496.31 3104,3492.31 3104,3445.5 3129.5,3420 U6.1 ; U7.7 4252.5,3900.34 4274.29,3900.34 4292.76,3918.81 v1(4293.74,3918.81)
  Bottom Layer w10: v1(3100,3500) 3890,3500 4090.57,3700.57 4090.57,3715.64 v1(4293.74,3918.81)
OR2: U7.3 U8.1 | length 726
  Top Layer w10: U7.3 4127.5,3879.66 4109.71,3879.66 4101,3870.94 4101,3629.53 4373,3357.53 4373,3335.5 4398.5,3310 U8.1
P_CHARGE_1: J2.1 U4.1 | length 1738.7
  Top Layer w10: U4.1 1750.5,3570.5 2350,4170 2350,4690 J2.1
P_CHARGE_2: J2.2 U5.1 | length 1937.5
  Top Layer w10: J2.2 2570,4810 2500,4810 2415,4725 2415,3820 2915,3320 U5.1
PWM_FAN: J2.19 J4.2 | length 802.1
  Bottom Layer w10: J4.2 2100,4610 2175,4685 2745,4685 J2.19
R: J2.13 R3.1 | length 873.5
  Top Layer w10: J2.13 3770,4910 3950,4910 4145,4715 4325,4715 4368.27,4671.73 4368.27,4581.26 4377.05,4572.48 R3.1
RX1_N: R4.1 T1.2 U1.10 | length 299.9
  Top Layer w10: R4.1 U1.10
  Top Layer w15: T1.2 2597.05,4000 2637.05,4040 R4.1
RX1_P: R4.2 T1.1 U1.11 | length 333.1
  Top Layer w10: R4.2 2664.41,3975.04 2709.69,4020.31 U1.11
  Top Layer w15: T1.1 2562.01,3900 2637.05,3975.04 R4.2
RX2_N: R7.2 T1.5 U2.10 | length 316
  Top Layer w10: R7.2 2700.7,4392.48 2712.6,4404.38 U2.10@2770.09,4404.38
  Top Layer w15: T1.5 2546.16,4300 2630.77,4384.61 R7.2@2630.77,4386.2
RX2_P: R7.1 T1.4 U2.11 | length 360.4
  Top Layer w10: R7.1 2667.52,4327.52 2724.38,4384.38 2725,4384.38 ; 2725,4385 2750.97,4385 2750.93,4384.96 U2.11
  Top Layer w15: T1.4 2498.66,4200 2619.9,4321.24 2633.72,4321.24 R7.1
SLAVE_CS: J2.30 U1.5 | length 1367.5
  Top Layer w10: U1.5 v1(3085,4040) ; v1(3920,4710) J2.30
  Bottom Layer w10: v1(3085,4040) 3395,4350 3560,4350 v1(3920,4710)
SLAVE_MISO: J2.28 U1.3 | length 1196.8
  Top Layer w10: U1.3 2940.68,4000.63 2956.31,3985 v1(2960,3985) ; v1(3720,4710) J2.28
  Bottom Layer w10: v1(2960,3985) 2961.33,3985 3365.66,4389.34 3399.34,4389.34 v1(3720,4710)
SLAVE_MOSI: J2.27 U1.2 | length 1127.8
  Top Layer w10: U1.2 2888.7,3980.94 2901.68,3967.96 2911.8,3967.96 v1(2914.41,3965.35) ; v1(3620,4710) J2.27
  Bottom Layer w10: v1(2914.41,3965.35) 2914.41,4004.41 v1(3620,4710)
SLAVE_SCK: J2.29 U1.4 | length 1288.4
  Top Layer w10: U1.4 2996,4020.31 3011.31,4005 v1(3015,4005) ; v1(3820,4710) J2.29
  Bottom Layer w10: v1(3015,4005) 3384.34,4374.34 3484.34,4374.34 v1(3820,4710)
pads on no net: *1.3 *1.4 *1.9 *1.10 *1.11 *1.12 *1.MH3 *1.MH4 *.9 *.10 *.11 *.12 *.MH3 *.MH4 J1.5 J1.6 J1.7 J1.8 J1.9 J1.10 J1.12 J1.13 J1.14 J2.7 J2.8 J2.9 J2.10 J2.14 J2.15 J2.20 J2.26 J3.M1 J4. J5.M1 J6.M1 J7.M1 J8.M1 J9.M1 J10.M1 J11.M1 J12.M1 T1.3 T1.8

## Polygon pours and split planes (outlines as drawn)
ISO-12V on PWR "ISO-12V" (solid, pour order 13): 4875,3875 4875,2500 870,2500 870,2710 865,3880 870,3875
3.3V on PWR "3.3V" (solid, pour order 12): 4360,4835 4360,3940 4370,3930 2645,3930 2645,4835
12V on PWR "12V" (solid, pour order 10): 4495,4852.5 4715,4632.5 4715,3935 4890,3935 4890,3505 4895,2520 5385,2520 5390,2525 5390,4985 2365,4985 1990,4610 2115,4485 2482.5,4852.5
GND on Top Layer "GND" (solid, pour order 9): 735,5500 740,5495 740,3785 5775,3785 5775,5485
ISO-GND on Top Layer "ISO-GND" (solid, pour order 11): 744.94,3759.94 745,3760 5775,3760 5775,2480 745,2480
3.3V on Top Layer "3.3V" (solid, pour order 16): 2760,4545 2760,4410 2890,4410 2890,4545
3.3V on Top Layer "3.3V" (solid, pour order 8): 2760,4185 2760,4050 2890,4050 2890,4185
GND on Bottom Layer "GND" (solid, pour order 14): 953.46,3805 5298.46,3805 5298.46,5356.53 948.46,5336.53 953.46,5331.53
ISO-GND on Bottom Layer "ISO-GND" (solid, pour order 15): 950,3735 5295,3735 5295,2355 5285,2365 950,2365
no net on GND "NONET_L02_P018" (solid, pour order 18): 925,3815 925,2190 5375,2190 5375,3825
ISO-GND on GND "ISO-GND_L02_P017" (solid, pour order 17): 940,5500 940,3875 5390,3875 5390,5510

## Text inside footprints (layer, text, board x,y; h text height)
J4: Mechanical 13 "NPTH D3.00+/-0.05" at 2402.83,4516.89 h19.68 r180; Mechanical 13 "PTH D1.80+/-0.05" at 2402.83,4477.52 h19.68 r180